# Altium PCB UCC28180-V02-XFMRS.PcbDoc
Units mil, origin at the board's own origin, x right, y up, seen from the top; angles counter-clockwise.
Board outline 6141.73 x 4803.15 mil, 2 copper layers (Top Layer, Bottom Layer), stack 12.8 mil thick; 76 components, 36 nets, 163 pads, 23 vias.
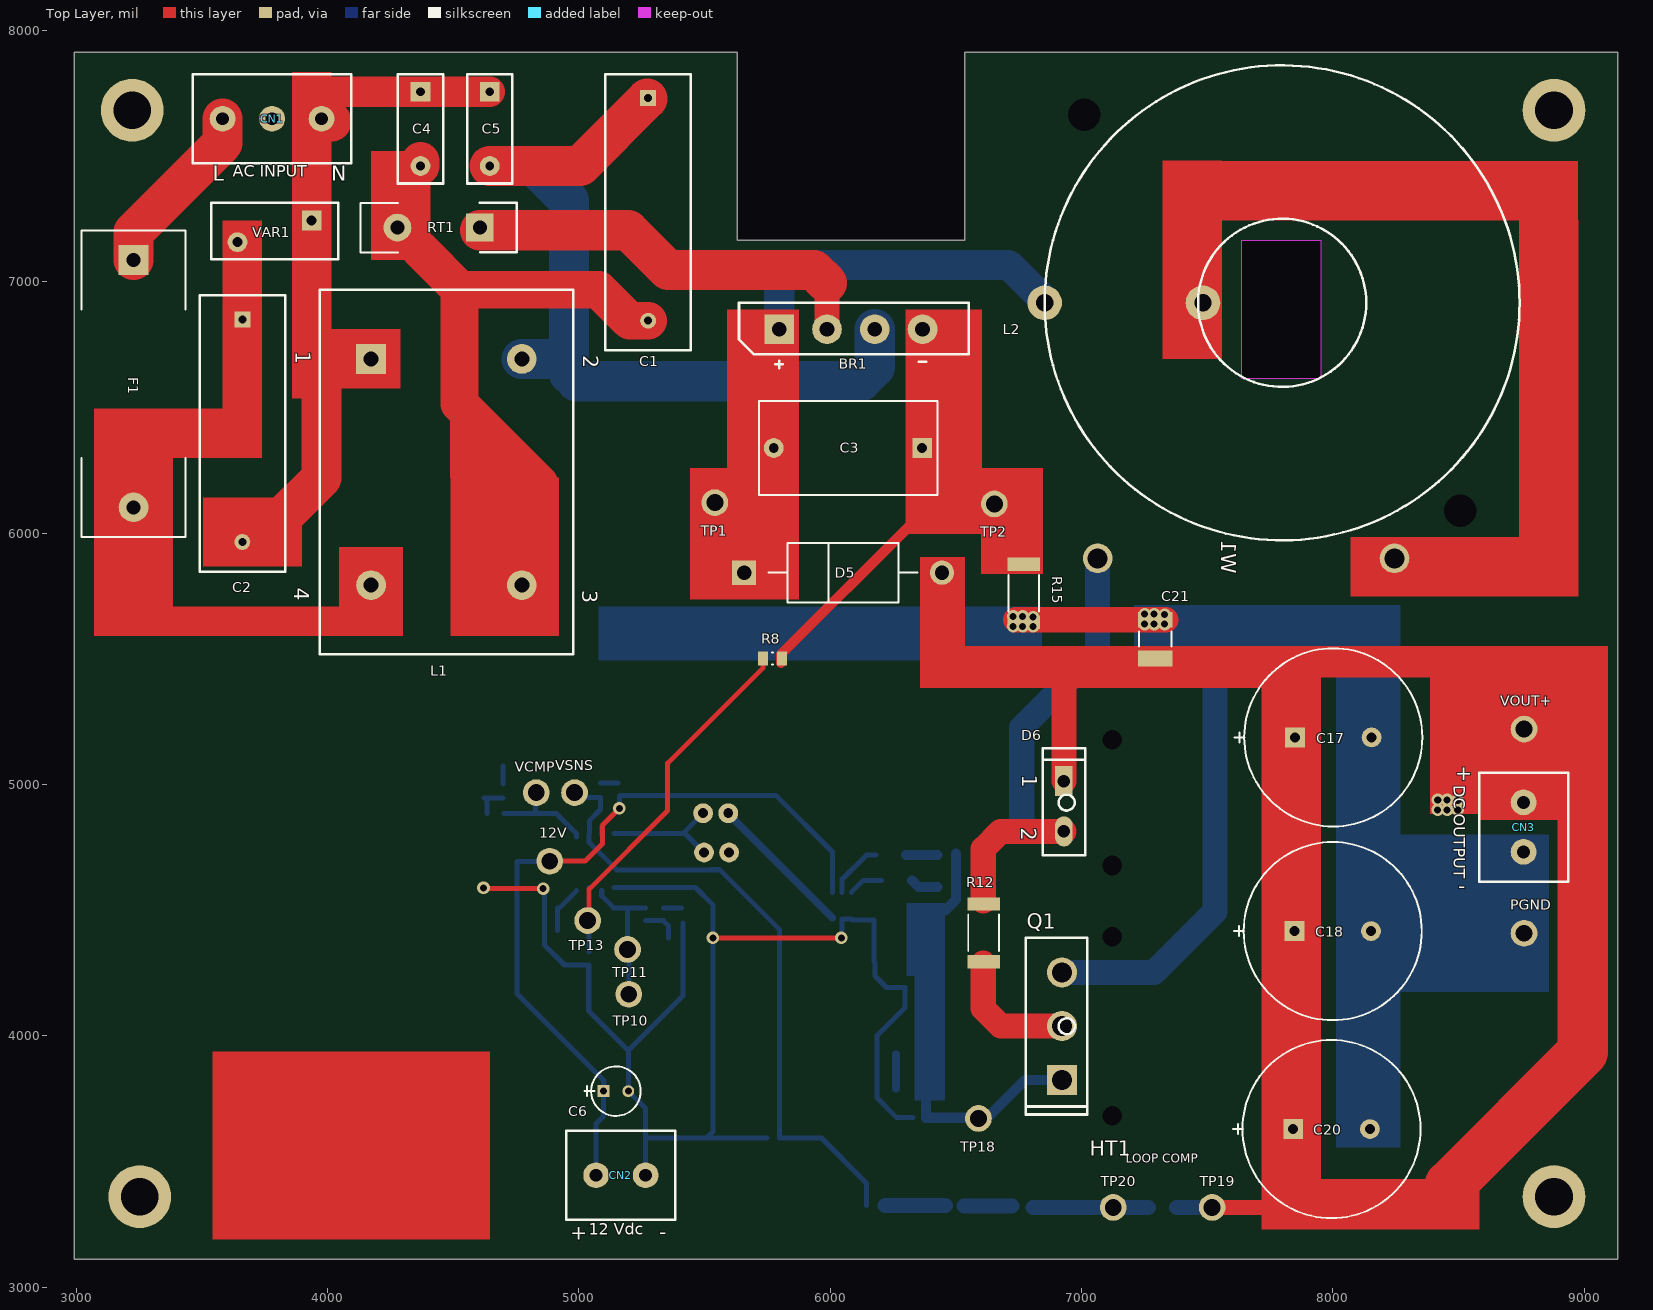
[diagram p0: Top Layer view]
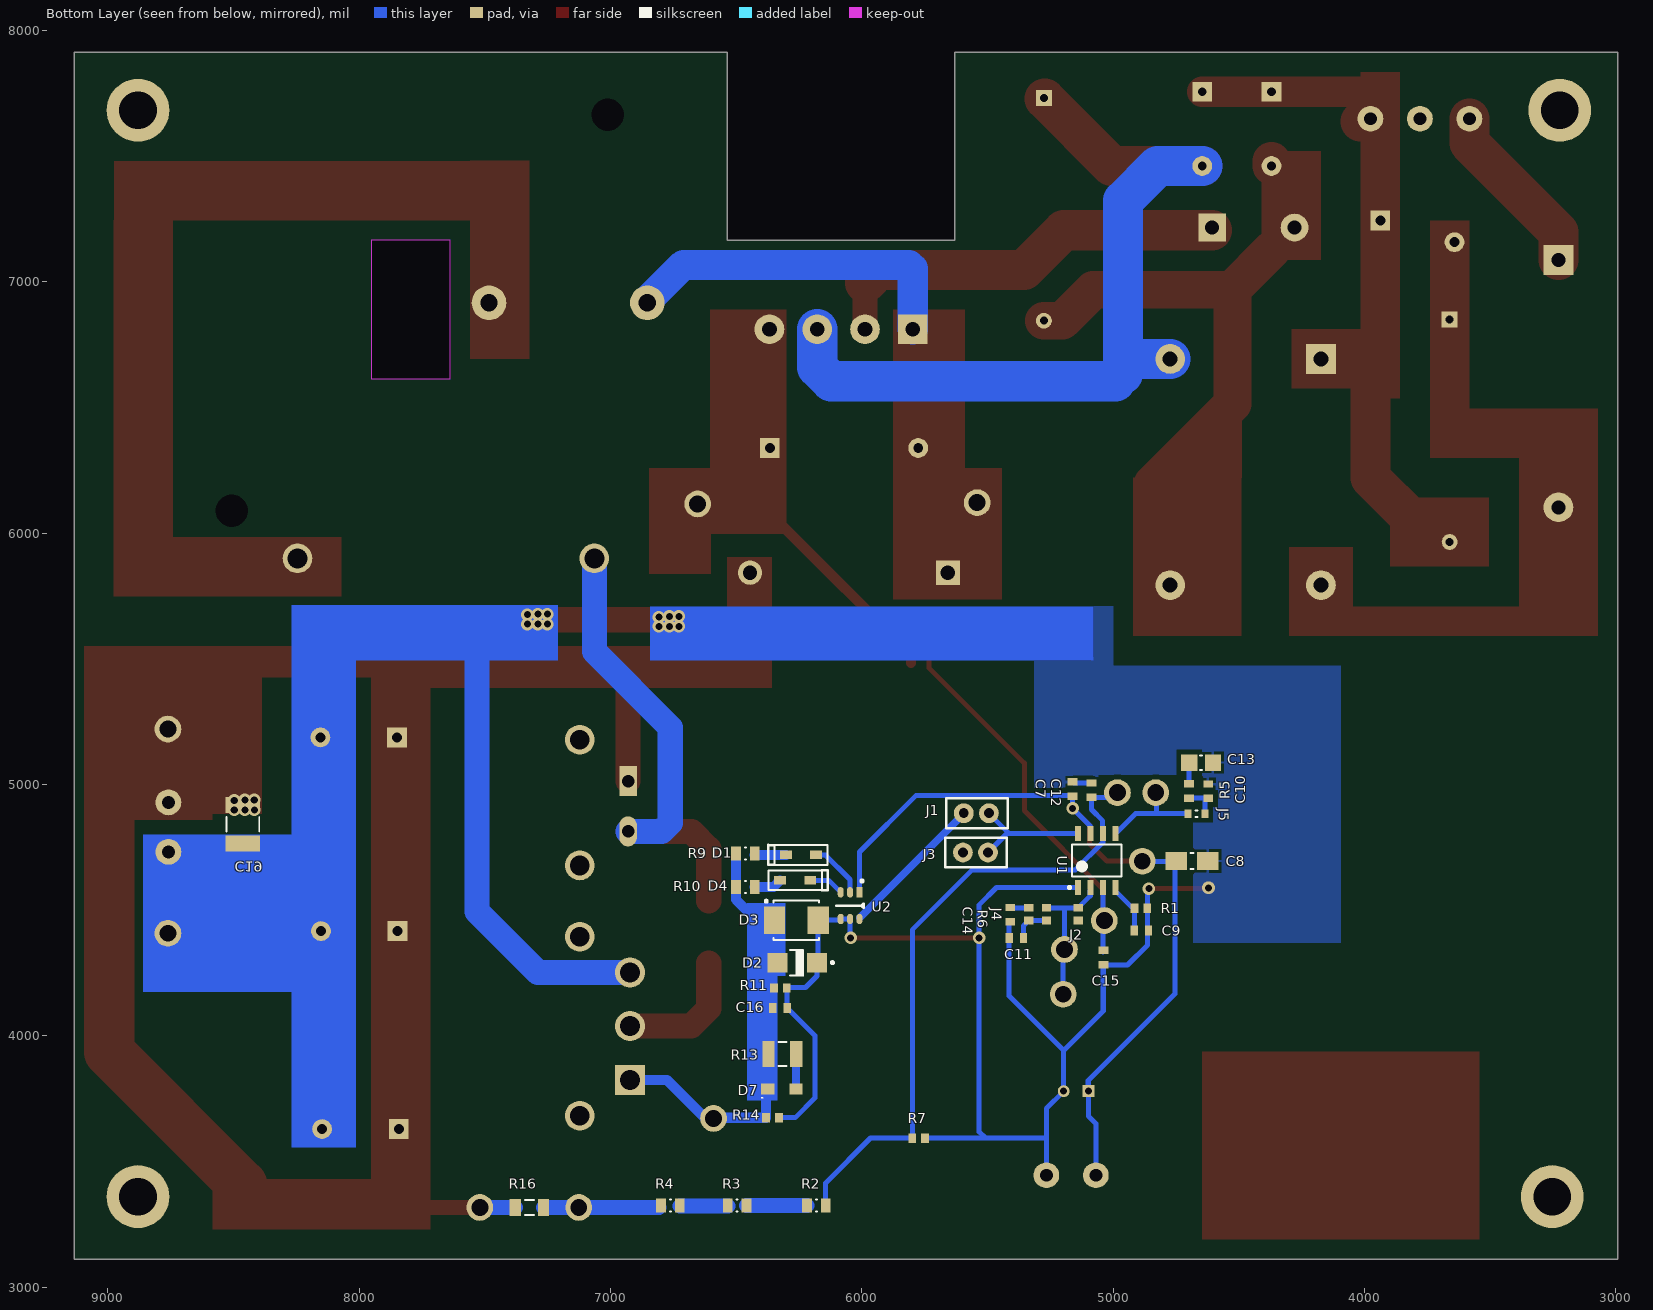
[diagram p1: Bottom Layer view, seen from below]

## Layer stack, top to bottom
Top Solder: solder mask 0.4, Solder Resist, Dk 3.5
Top Layer: signal copper 1.4
Dielectric 1: core 10, FR-4, Dk 4.2
Bottom Layer: signal copper 1.4
Bottom Solder: solder mask 0.4, Solder Resist, Dk 3.5

## Board outline
2992.13,7913.39 5629.92,7913.39 5629.92,7716.54 5629.92,7519.69 5629.92,7322.83 5629.92,7165.35 6535.43,7165.35 6535.43,7519.69 6535.43,7913.39 9133.86,7913.39 9133.86,3110.24 2992.13,3110.24
cut-out: 7637.8,7165.35 7952.76,7165.35 7952.76,6889.76 7952.76,6614.17 7637.8,6614.17

## Design rules (kind name [scope] priority, off if disabled: settings)
Clearance Clearance_2 [InNamedPolygon('Bottom Layer-No Net')] p1: gap=10 except(20: Poly-Poly Poly-Region Poly-Text)
Clearance [All] p2: gap=20 except(10: Arc-Track Arc-SMDPad Track-Track Track-SMDPad SMDPad-SMDPad)
ComponentClearance [All] p1: gap=10 collisioncheckmode=3 verticalgap=5 showdistances=FALSE
OvershootFalling [IsDesignator] p1: maximum=1.000
PolygonConnect PolygonConnect_1 [All vs IsNamedPolygon('GND_L03_P014')] p1: connectstyle=Relief reliefconductorwidth=10 reliefentries=4 polygonreliefangle="90 Angle" airgapwidth=10
PolygonConnect [All] p2: connectstyle=Relief reliefconductorwidth=10 reliefentries=4 polygonreliefangle="90 Angle" airgapwidth=10
RoutingVias [All] p1: holewidth=28 width=50 viastyle="Through Hole" minholewidth=28 minwidth=50 maxholewidth=28 maxwidth=50
SolderMaskExpansion [All] p1: expansion=4
Width [All] p1: maxlimit=300 minlimit=10 preferedwidth=40
29 further rules are at their usual default settings.

## Classes and differential pairs
component class UCC28180-2-V02: 12V C6 C7 C8 C9 C10 C11 C12 C13 C14 C15 CN2 J1 J2 J3 J4 J5 PGND R1 R2 R3 R4 R5 R6 R7 R8 TP10 TP11 TP13 U1 VCMP VSNS
component class "UCC 28180-1-V02": BR1 C1 C2 C3 C4 C5 CN1 F1 L1 RT1 TP1 TP2 VAR1
component class UCC28180-3-V02: C16 C17 C18 C19 C20 C21 CN3 D1 D2 D3 D4 D5 D6 D7 HT1 L2 Q1 R9 R10 R11 R12 R13 R14 R15 R16 TP18 TP19 TP20 U2 VOUT+ W1

## Components (designator, comment, footprint, x,y, rotation, side; value= is the part's Value field where it differs from the comment)
12V "5006" "Test Point" 4884,4694.64 r90 top (schematic designator TP9)
BR1 "GBU8J-BP" GBU8J 5797.24,6811.02 r0 top
C1 "ECQ-U2A474ML" ECQ-U2A474ML 5275.59,7730.91 r270 top
C2 "ECQ-U2A474ML" ECQ-U2A474ML 3661.42,6850.39 r270 top
C3 "ECQ-U2A334ML" CAPFILM0.33U 6366.14,6338.58 r180 top
C4 "CS11-E2GA222MYNS" CS11-E2GA222MYNS 4370.08,7755.91 r270 top
C5 "CS11-E2GA222MYNS" CS11-E2GA222MYNS 4645.67,7755.91 r270 top
C6 "ECA-1VM470" CAPALUM47U 5098.43,3779.53 r0 top
C7 "06035C104KAT2A" CAP0603 5161.26,4981.95 r90 bottom
C8 "GRM32RR71H105KA01K" CAP1206 4686.14,4695.06 r0 bottom
C9 "" CAP0603 4887.97,4418.73 r0 bottom
C10 "C0603C474K4RACTU" CAP0603 4621.88,4973.13 r270 bottom
C11 "GRM188R71H272KA01D" CAP0603 5385.4,4389.18 r180 bottom
C12 "C0603C821K5RACTU" CAP0603 5086.42,4977.13 r270 bottom
C13 "GRM21BR71A475KA73L" CAP0805 4650.17,5086.7 r0 bottom
C14 "C0603--" CAP0603 5409.33,4481.64 r90 bottom
C15 "06031C102KAT2A" CAP0603 5039.09,4311.16 r90 bottom
C16 "C0603C22NF" CAP0603 6326.04,4111.05 r0 bottom
C17 "450QXW120MEFC18X31.5" 450QXW120MEFC18X31.5 7849.25,5187.25 r0 top
C18 "450QXW120MEFC18X31.5" 450QXW120MEFC18X31.5 7846.89,4416.23 r0 top
C19 "GRM43DR72J104KW01L" CAP1812 8462.44,4841.34 r90 bottom
C20 "450QXW120MEFC18X31.5" 450QXW120MEFC18X31.5 7842.17,3628.71 r0 top
C21 "GRM43DR72J104KW01L" CAP1812 7293.04,5578.38 r270 top
CN1 "1935789" CONN_1935789 3976.38,7648.74 r180 top
CN2 "1935776" CONN_1935776 5265.75,3444.88 r180 top
CN3 "1935776" CONN_1935776 8758.94,4928.49 r270 top
D1 "DB2W40300L" Mini2-F3-B 6242.06,4719.47 r0 bottom
D2 "1SMA12CAT3G" ONSC-SMA-2-403D-02_F_V 6256.83,4290.83 r0 bottom
D3 "1SMB5927BT3G" ONSC-SMB-2-403A-03_H_V 6260.73,4459.7 r180 bottom
D4 "DB2W40300L" Mini2-F3-B 6265.19,4618.41 r180 bottom
D5 "1N5406" 1N5406 6444.88,5842.52 r180 top
D6 "C3D04060A" C3D04060A 6930,5012.98 r270 top
D7 "MBR140SFT1G" SODFL360X95-2N 6318.02,3788.4 r0 bottom
F1 "FUSE" 0031.8211 3228.35,7086.61 r270 top
HT1 "WA-DT2-101E-ND" WA-DT2-101E-ND 7122.14,5177.71 r270 top
J1 "M20-9990246" JUMPER 5494.45,4885.55 r0 bottom
J2 "M20-9990246" RES0603 5138.97,4483.61 r90 bottom
J3 "M20-9990246" JUMPER 5498.04,4729.29 r0 bottom
J4 "M20-9990246" RES0603 5265.16,4483.61 r90 bottom
J5 "M20-9990246" 0603R 4668.75,4883.53 r180 bottom
L1 "8113-RC" "EMI Choke" 4173.23,6692.91 r270 top
L2 "XFUSMI4846-HO" XFUSMI4846-HO 6065.93,6916.16 r0 top
PGND "5006" "Test Point" 8760.91,4407.51 r0 top (schematic designator TP3)
Q1 "C3M0065090D" TO-247-3 6922.31,3824.51 r90 top
R1 "CRCW060317K8FKEA" RES0603 4889.93,4507.7 r180 bottom
R2 "CRCW0805340KFKEA" RES0805 6181.1,3324.8 r180 bottom
R3 "CRCW0805332KFKEA" RES0805 6496.06,3324.8 r180 bottom
R4 "CRCW0805332KFKEA" RES0805 6761.81,3324.8 r180 bottom
R5 "CRCW060322K6FKEA" CAP0603 4697.58,4973.6 r90 bottom
R6 "CRCW0603--" RES0603 5336.3,4483.61 r90 bottom
R7 "CRCW060313K3FKEA" RES0603 5773.72,3592.93 r180 bottom
R8 "CRCW0603221RFKEA" RES0805 5770.63,5501.12 r180 top
R9 "CRCW0805R10" RES0805 6463.42,4724.97 r180 bottom
R10 "CRCW0805R4.99" RES0805 6463.42,4592.03 r180 bottom
R11 "CRCW0603RES10K" RES0603 6324.19,4190.07 r180 bottom
R12 "CRCWRSHUNT" RES2512 6610.39,4409.1 r270 top
R13 "ERJ-P14J3R3U" RES1210 6316.06,3927.56 r180 bottom
R14 "CRCW060310K0FKEA" RES0603 6355.43,3673.85 r180 bottom
R15 "CRCW2512R0.027" RES2512 6769.97,5760.92 r90 top
R16 "CRCW120649R9FKEA" RES1206 7322.83,3316.93 r180 bottom
RT1 "CL-40" CL-40 4606.3,7215.67 r180 top
TP1 "5006" "Test Point" 5541.18,6121.1 r0 top
TP2 "5006" "Test Point" 6653.39,6116.1 r0 top
TP10 "5006" "Test Point" 5198.81,4165.23 r90 top
TP11 "5006" "Test Point" 5193.66,4343.21 r270 top
TP13 "5006" "Test Point" 5035.1,4458.19 r90 top
TP18 "5006" "Test Point" 6590.12,3670.93 r90 top
TP19 "5006" "Test Point" 7519.69,3316.93 r90 top
TP20 "5006" "Test Point" 7125.98,3316.93 r90 top
U1 "UCC28180DR" SOP127P600X175-8N 5065.24,4697.3 r90 bottom
U2 "UCC27511DBV" SOP6 6009.49,4570.66 r270 bottom
VAR1 "S10K275E2" S10K275E2 3937.01,7244.09 r180 top
VCMP "5006" "Test Point" 4830.79,4967.39 r90 top (schematic designator TP14)
VOUT+ "5006" "Test Point" 8760.91,5220.37 r0 top (schematic designator TP17)
VSNS "5006" "Test Point" 4983.13,4967.39 r90 top (schematic designator TP12)
W1 "Wire" "Current Sense Wire" 8245.3,5899.27 r180 top

## Footprints (in the part's own frame and the unit in brackets; to place one, negate y for a bottom-side part, rotate by r counter-clockwise, add the part's x,y. Pads: shape width x height; smd on the part's side, far side on the other; paste and mask are expansions set on the pad)
1N5406 [mm] "Diode"
  rect 2.45x2.45 hole 1.45: 1(20,0)
  round 2.45 hole 1.45: 2(0,0)
  silkscreen extent 2.45,-3 17.55,3
0031.8211 [mm] "Fuse Holder"
  rect 3x3 hole 1.4: 1(0,0)
  round 3 hole 1.4: 2(25,0)
  silkscreen extent -3,-5.25 28,5.25, body extent 0.8,-4.62 24.9,4.98, height 11.51
450QXW120MEFC18X31.5 [mm] "Radial Electrolytic Capacitor"
  rect 2x2 hole 1: 1(0,0)
  round 2 hole 1: 2(7.75,0)
  silkscreen extent -6.1,-9 12.87,9, body extent -5.24,-9.25 12.96,8.94, height 39.75
0603R [mm]
  rect 0.7x0.85 smd: 1(-0.85,0) 2(0.85,0)
  silkscreen extent -0.1,-0.33 0.1,0.33, body extent -0.8,-0.4 0.8,0.4, height 0.6
C3D04060A [mil] "Schotky diode"
  rect 120x69.69 hole 50: 1(0,0)
  oval 120x69.69 hole 50: 2(200,0)
  silkscreen extent -130,-85 295,85
CAP0603 [mm]
  rect 0.75x1 smd: 1(-0.725,0) 2(0.725,0)
  body extent -0.87,-0.48 0.87,0.47, height 0.5
CAP0805 [mm] "Ceramic Capacitor"
  rect 1.65x1.65 smd: 1(-1.2,0) 2(1.2,0)
  silkscreen extent -0.1,-0.72 0.1,0.72, body extent -1.6,-0.76 1.6,0.76, height 2
CAP1206 [mm] "Ceramic Capacitor"
  rect 2.15x1.85 smd: 1(-1.6,0) 2(1.6,0)
  silkscreen extent -0.15,-0.82 0.15,0.82, body extent -2.25,-0.86 2.25,0.86, height 2
CAP1812 [mm] "Capacitor"
  rect 1.6x3.5 smd: 1(-1.95,0) 2(1.95,0)
  silkscreen extent -0.75,-1.65 0.75,1.65, body extent -2.4,-1.75 2.4,1.75, height 0.7
CAPALUM47U [mm] "Aluminum Capacitor"
  rect 1.2x1.2 hole 0.7: 1(0,0)
  round 1.2 hole 0.7: 2(2.5,0)
  silkscreen extent -1.93,-2.5 3.75,2.5, body extent -1.38,-2.54 3.82,2.66, height 11.5
CAPFILM0.33U [mm] "Film Capacitor"
  rect 2x2 hole 1: 1(0,0)
  round 2 hole 1: 2(15,0)
  silkscreen extent -1.52,-4.75 16.51,4.75
CL-40 [mm] "NTC Thermistor"
  rect 2.8x2.8 hole 1.4: 1(0,0)
  round 2.8 hole 1.4: 2(8.33,0)
  silkscreen extent -3.75,-2.5 12.08,2.5
CONN_1935776 [mm] "2 Pin Connector"
  round 2.6 hole 1.3: 1(0,0) 2(5,0)
  silkscreen extent -3,-4.5 8,4.5, body extent -3.2,-5.2 7.4,4.6, height 13.81
CONN_1935789 [mm] "3 Pin Connector"
  round 2.6 hole 1.3: 1(0,0) 2(5,0) 3(10,0)
  silkscreen extent -3,-4.5 13,4.5
CS11-E2GA222MYNS [mm] "Disc Cap"
  rect 2x2 hole 0.9: 1(0,0)
  round 2 hole 0.9: 2(7.5,0)
  silkscreen extent -1.78,-2.29 9.27,2.29
"Current Sense Wire" [mm]
  round 3 hole 2: 1(0,0) 2(30,0)
ECQ-U2A474ML [mm] "Film Capacitor"
  rect 1.6x1.6 hole 0.8: 1(0,0)
  round 1.6 hole 0.8: 2(22.5,0)
  silkscreen extent -2.41,-4.32 25.49,4.32
"EMI Choke" [mm]
  rect 3x3 hole 1.5: 1(0,0)
  round 3 hole 1.5: 2(0,15.24) 3(22.86,15.24) 4(22.86,0)
  silkscreen extent -6.99,-5.21 29.84,20.45
GBU8J [mm] "Bridge rectifier"
  rect 3x3 hole 1.5: 1(0,0)
  round 3 hole 1.5: 2(4.83,0) 3(9.66,0) 4(14.49,0)
  silkscreen extent -4.06,-3.94 19.18,2.67
JUMPER [mm] "JUMPER"
  round 2 hole 1: 1(0,0) 2(2.54,0)
  silkscreen extent -1.91,-1.5 4.32,1.5, body extent -1.15,-1.17 3.85,1.17, height 3
Mini2-F3-B [mm] "Schottky Diode"
  rect 1.2x0.85 smd: 1(1.525,0) 3(-1.525,0)
  silkscreen extent -2.7,-1.02 3.3,1
ONSC-SMA-2-403D-02_F_V [mm] "Molded, 2-Leads, Body 4.32x2.6mm"
  rect 2x2 smd: 1(-2,0) 2(2,0)
  silkscreen extent -3.67,-1.3 0.74,1.3, body extent -2.16,-1.3 2.16,1.3, height 2.2
ONSC-SMB-2-403A-03_H_V [mil] "Molded, 2-Leads, Body 4.6x3.95mm"
  rect 85x107.99 smd: 1(-87.01,0) 2(87.01,0)
  silkscreen extent -125,-79 91,81, body extent -91,-78 91,78, height 95
RES0603 [mm]
  rect 0.8x0.95 smd: 1(-0.65,0) 2(0.65,0)
  body extent -0.83,-0.48 0.82,0.48, height 0.5
RES0805 [mm]
  rect 1x1.4 smd: 1(-0.95,0) 2(0.95,0)
  silkscreen extent -0.05,-0.6 0.05,0.6, body extent -1.1,-0.7 1.1,0.7, height 0.5
RES1206 [mm]
  rect 1.15x1.75 smd: 1(-1.425,0) 2(1.425,0)
  silkscreen extent -0.45,-0.77 0.45,0.77, body extent -1.65,-0.87 1.65,0.87, height 0.5
RES1210 [mm] "Chip Resistor"
  rect 1.25x2.65 smd: 1(-1.4,0) 2(1.4,0)
  silkscreen extent -0.4,-1.22 0.4,1.23, body extent -1.68,-1.32 1.68,1.32, height 2
RES2512 [mm]
  rect 1.35x3.3 smd: 1(-2.925,0) 2(2.925,0)
  silkscreen extent -1.85,-1.55 1.85,1.55, body extent -3.25,-1.65 3.25,1.65, height 0.7
S10K275E2 [mm] "Varistor"
  rect 2x2 hole 1: 1(0,0)
  round 2 hole 1: 2(7.5,2.2)
  silkscreen extent -2.67,-1.78 10.16,3.94
SODFL360X95-2N [mm] "SODFL, 2-Leads, Body 1.65x3.60mm, IPC Medium Density"
  rect 1.35x1.1 smd: 1(-1.425,0) 2(1.425,0)
  silkscreen extent 1.96,0.86 2.06,0.96, body extent -1.45,-0.9 1.45,0.9, height 0.95
SOP6 [mm]
  rect 1.05x0.6 smd: 1(0,0)
  oval 1.05x0.6 smd: 2(0,-0.95) 3(0,-1.9) 4(2.7,-1.9) 5(2.7,-0.95) 6(2.7,0)
  silkscreen extent -1.27,-2.38 1.59,0.48, body extent 0.67,-2.34 2.02,0.46, height 2
SOP127P600X175-8N [mm] "SOP, 8-Leads, Body 4.90x3.90mm, Pitch 1.27mm, IPC Medium Density"
  rect 1.55x0.6 smd: 1(-2.725,1.905) 2(-2.725,0.635) 3(-2.725,-0.635) 4(-2.725,-1.905) 5(2.725,-1.905) 6(2.725,-0.635) 7(2.725,0.635) 8(2.725,1.905)
  silkscreen extent -2.85,-2.5 1.6,2.88, body extent -2,-2.5 2,2.5, height 1.75
"Test Point" [mm] "Test Point"
  round 2.7 hole 1.7: 1(0,0)
  body extent -1.63,-1.5 1.55,1.68, height 5.49
TO-247-3 [mm] "Transistor"
  rect 3.04x3.04 hole 2.03: 1(0,0)
  round 3.04 hole 2.03: 2(5.43,0) 3(10.86,0)
  silkscreen extent -3.5,-2.54 14.36,3.68
WA-DT2-101E-ND [mm] "Heatsunk"
  round 0 / inner round 0 / far side round 3 hole 2: 1(0,0) 2(12.7,0) 3(19.9,0) 4(38,0)
  silkscreen extent 5.54,-5.4 29.76,-3.79, body extent -5,-9 43,7, height 7.25
XFUSMI4846-HO [mm] "Boost Inductor"
  round 3.5 hole 1.75: 1(20,0) 2(36,0)
  silkscreen extent 20,-24 68,24, body extent 19.94,-23.06 67.44,24.43, height 22.87

## Part data
12V PGND TP1 TP2 TP10 TP11 TP13 TP18 TP19 TP20 VCMP VOUT+ VSNS: "TEST POINT PC COMPACT .063\"D BLK"
BR1: "RECT BRIDGE GPP 8A 600V GBU"
C1 C2: "CAP FILM 0.47UF 20% 275VAC RAD"
C3: "CAP FILM 0.33UF 20% 275VAC RAD"
C4 C5: "CAP CER 2200PF 250VAC RADIAL"
C6: "CAP ALUM 47UF 20% 35V RADIAL"
C7: "CAP CER 0.1UF 50V X7R 0603"
C8: "CAP CER 1UF 50V X7R 1210"
C9: library part Cap, "Capacitor"
C10: "CAP CER 0.47UF 16V X7R 0603"
C11: "CAP CER 2700PF 50V X7R 0603"
C12: "CAP CER 820PF 50V X7R 0603"
C13: "CAP CER 4.7UF 10V X7R 0805"
C15: "CAP CER 1000PF 100V X7R 0603"
C19 C21: "CAP CER 0.1UF 630V X7R 1812"
CN1: "CONN TERM BLOCK 3POS 5.0MM"
CN2 CN3: "CONN TERM BLOCK 2POS 5.0MM"
D2: "400 W Peak Power Zener Transient Voltage Suppressor, 2-Pin SMA, Pb-Free, Tape and Reel"
D3: "3 W Zener Voltage Regulator, 2-Pin SMB, Pb-Free, Tape and Reel"
D5: library part 1N5406RLG, "DIODE GEN PURP 600V 3A DO201AD"
D6: "DIODE SCHOTTKY 600V 4A TO220-2"
D7: "DIODE SCHOTTKY 40V 1A SOD123L"
J1 J2 J3 J4 J5: "SIL VERTICAL PC TAIL PIN HEADER"
L1: "CMC 5MH 8.9A 2LN TH"
Q1: "MOSFET N-CH 900V 36A TO247-3"
R1: "RES SMD 17.8K OHM 1% 1/10W 0603"
R2: "RES SMD 340K OHM 1% 1/8W 0805"
R3 R4: "RES SMD 332K OHM 1% 1/8W 0805"
R5: "RES SMD 22.6K OHM 1% 1/10W 0603"
R7: "RES SMD 13.3K OHM 1% 1/10W 0603"
R8: "RES SMD 221 OHM 1% 1/10W 0603"
R13: "RES SMD 3.3 OHM 5% 1/2W 1210"
R14: "RES SMD 10K OHM 1% 1/10W 0603"
R16: "RES SMD 49.9 OHM 1% 1/4W 1206"
RT1: "ICL 5 OHM 25% 6A 19.56MM"
U1: "IC PFC CTRLR AVERAGE CURR 8SOIC"
VAR1: "VARISTOR 430V 3.5KA DISC 10MM"

## Free pads (board coordinates)
  round 250 hole 150: 1(3223.21,7682.2) 2(8880,7682.2) 3(8880,3360) 4(3253.07,3360)
  round 0 hole 130: 5(7010.81,7664.19) 6(8506.87,6089.39)

## Via types
v1: diameter 50, hole 28, Top Layer to Bottom Layer, 13 vias
v2: diameter 50, hole 28, Top Layer to Bottom Layer, tented top, 6 vias
v3: diameter 50, hole 28, Top Layer to Bottom Layer, tented both sides, 4 vias

## Nets (pads, with @x,y where several pads share a name; then routed paths per layer and width w, separated by ;. In a path a pad name is that pad's centre, name@x,y a point inside that pad or via, vN(x,y) a via of type N, cw(c..) or ccw(c..) an arc to the next point about the centre after c; other vN are vias at no path point)
12V: 12V.1 C6.1 C7.1 C8.2 CN2.2 U1.7 U2.1 | length 3225.2
  Top Layer w20: 12V.1 5024.66,4694.64 5056.07,4726.04 5056.16,4726.04 5093.47,4763.34 5093.47,4836.63 v3(5161.26,4904.42)
  Bottom Layer w20: 12V.1@4882.19,4692.83 4754.91,4692.83 4754.91,4165.84 5099.16,3821.59 C6.1@5099.16,3780.27 ; CN2.2 5068.9,3650.53 5098.43,3680.05 C6.1 ; U1.7 5090.24,4833.4 v3(5161.26,4904.42) C7.1 5164.66,4956.82 5783.72,4956.82 6009.49,4731.05 U2.1 ; U1.7@5090.56,4799.93 5090.64,4804.57 U1.7@5090.6,4802.25
GND: C6.2 C7.2 C8.1 C9.1 C10.1 C11.1 C12.1 C13.1 C14.1 C15.1 C16.1 C17.2 C18.2 C19.1 C20.2 C21.1 CN2.1 CN3.2 D2.1 D3.2 PGND.1 Q1.3 R1.2 R7.2 R11.2 R14.2 R15.1 U1.1 U2.4 U2.5 | length 8295.3
  Top Layer w20: v1@4620.63,4585.67 v3(4857.83,4585.67) ; v3(5533.16,4389.18) v3(6044.2,4389.18)
  Top Layer w100: R15.1@6737.95,5655.15 C21.1@7336.66,5655.15
  Bottom Layer w20: R1.2@4863.64,4509.28 4863.64,4360.68 4942.75,4281.56 5039.5,4281.56 5039.5,4098.59 5196.85,3941.23 ; R1.2 v3@4864.34,4579.16 ; C12.1 C7.2@5156.44,5005.68 ; U1.1 5464.14,4590.01 5533.16,4520.99 v3(5533.16,4389.18) 5533.16,3617.92 5508.17,3592.93 ; CN2.1 5265.75,3710.63 C6.2 5196.85,3941.23 ; 5268.21,3592.93 5508.17,3592.93 ; C14.1@5413.95,4448.48 C11.1 5413.95,4158.33 5196.85,3941.23 ; R7.2 5508.17,3592.93 ; v3@6046.89,4391.87 U2.5 U2.4 6088.95,4459.7 D3.2 D2.1@6173.72,4295.19 ; D2.1 6178.09,4237.76 6224.1,4191.75 R11.2@6296.92,4191.75 ; C16.1 6187.24,4000.8 6187.24,3752.04 6265.42,3673.85 R14.2 ; C16.1@6298.6,4112.15 R11.2
  Bottom Layer w100: Q1.3 7288.74,4252.07 7531.33,4494.66 7531.33,5653.08
  other v1: 4620.63,4588.22 6727.82,5628.53 6765.89,5628.53 6807.9,5628.53 7250.9,5637.92 7288.97,5637.92 7330.98,5637.92 6807.9,5665.96 6728.28,5668.46 6765.89,5667.99 7330.98,5675.34 7288.97,5677.38 7251.36,5677.84
NetBR1_1: BR1.1 C3.2 D5.1 L2.1 TP1.1 | length 1347.3
  Bottom Layer w120: BR1.1 5797.24,7052.24 ; 5811.93,7066.93 6710.1,7066.93 L2.1@6857.1,6919.93
NetBR1_2: BR1.2 RT1.1 | length 1651.9
  Top Layer w100: BR1.2 5987.4,6994.88
  Top Layer w160: RT1.1@4606.3,7204.72 5196.85,7204.72 5354.33,7047.24 5935.04,7047.24 5987.4,6994.88
NetBR1_3: BR1.3 C1.1 C5.2 L1.2 | length 3288.3
  Top Layer w160: C5.2 5005.31,7460.63 C1.1@5272.42,7727.74
  Bottom Layer w160: C5.2 4822.83,7460.63 4960.63,7322.83 4960.63,6633.86 ; L1.2 4901.57,6692.91 ; 4990.16,6604.33 6122.05,6604.33 6177.56,6659.84 BR1.3
NetBR1_4: BR1.4 C3.1 R8.1 R15.2 TP2.1 | length 814.3
  Top Layer w40: R8.1@5804.62,5484.07 5804.62,5517.72 6322.12,6035.22 6322.12,6084.03
NetC1_2: C1.2 C4.2 L1.3 RT1.2 | length 1962.3
  Top Layer w150: 4370.08,7125.98 4527.56,6968.5 5078.74,6968.5 5202.17,6845.08 C1.2 ; C4.2 C4.2@4370.08,7480.31 ; 4525.51,6970.55 4525.51,6514.49 4842.52,6197.48 4842.52,6181.1
NetC2_1: C2.1 F1.2 L1.4 VAR1.2
NetC2_2: C2.2 C4.1 C5.1 CN1.1 L1.1 VAR1.1 | length 1362.5
  Top Layer w120: 4010.67,7755.91 C4.1 C5.1
  Top Layer w160: 3799.21,5964.57 3799.21,6043.31 3976.38,6220.47 3976.38,6574.8 ; CN1.1 4004.8,7648.74 CN1.1@4015.75,7637.8
NetC9_2: C9.2 R1.1 U1.4 | length 193.3
  Bottom Layer w20: R1.1 R1.1@4915.96,4507.7 ; C9.2@4915.96,4418.73 R1.1@4915.96,4507.7 ; U1.4@4991.21,4576.93 4921.98,4507.7 R1.1@4915.96,4507.7
NetC10_2: C10.2 J5.2 R5.1 | length 122.9
  Bottom Layer w20: C10.2@4622.35,4945.06 R5.1 ; J5.2 C10.2@4635.29,4931.18
NetC11_2: C11.2 J4.1 R6.1 | length 148.5
  Bottom Layer w20: J4.1 R6.1 5356.86,4437.46 C11.2
NetC12_2: C12.2 R2.2 R7.1 U1.6 VSNS.1 | length 2515.8
  Bottom Layer w20: VSNS.1@5001.93,4948.59 C12.2 5086.42,4900.09 5041.67,4855.34 U1.6@5041.67,4806.01 ; U1.6@5040.71,4800.23 5040.71,4769.84 5150.64,4659.92 5526.77,4659.92 5527.35,4660.49 5560.13,4660.49 5799.31,4421.3 R7.1 5965.25,3592.93 6143.7,3414.48 R2.2
NetC13_2: C13.2 R5.2 | length 70.5
  Bottom Layer w20: R5.2 C13.2@4697.58,5072.64
NetC14_2: C14.2 R6.2 | length 72
  Bottom Layer w20: R6.2 C14.2@5408.34,4509.2
NetC15_2: C15.2 R8.2 TP13.1 U1.3 | length 1592.3
  Top Layer w20: TP13.1@5026.1,4458.92 5040.89,4473.71 5040.89,4583.15 5353.61,4895.87 5353.61,5084.49 5733.23,5464.12 R8.2
  Bottom Layer w20: C15.2@5040.24,4332.85 U1.3
NetC16_2: C16.2 D2.2 D3.1 D7.2 Q1.1 R9.1 R10.1 R11.1 R13.1 R14.1 TP18.1 | length 1118.3
  Bottom Layer w40: R13.1@6364.61,3934.12 R13.1 6371.17,3791.35 D7.2 ; D7.2@6381.02,3781.51 R14.1 6625.22,3673.85 6775.88,3824.51 Q1.1 ; 6444.71,4498.69 6458.02,4498.69 6500.82,4541.49 R10.1 R9.1
NetC17_1: C17.1 C18.1 C19.2 C20.1 C21.2 CN3.1 D5.2 D6.1 R16.1 TP19.1 VOUT+.1 | length 2558.8
  Top Layer w60: TP19.1 7744.75,3316.93
  Top Layer w100: D6.1 6930,5438.54
  Top Layer w200: 8464.57,3405.55 8994.31,3935.29 8994.31,4953.59
  Bottom Layer w60: R16.1 TP19.1
  other v2: 8416.97,4898.58 8455.04,4898.58 8497.05,4898.58 8497.05,4936 8455.04,4938.04 8417.43,4938.5
NetCN1_3: CN1.3 F1.1 | length 708.9
  Top Layer w160: F1.1 3228.35,7197.83 3582.68,7552.17 CN1.3
NetD1_1: D1.1 R9.2 | length 123.9
  Bottom Layer w40: D1.1 R9.2@6426.02,4719.47
NetD1_3: D1.3 U2.2 | length 226.5
  Bottom Layer w20: U2.2 6046.89,4621.37 6144.99,4719.47 D1.3
NetD4_1: D4.1 U2.3 | length 140.6
  Bottom Layer w20: U2.3 6132.04,4618.41 D4.1
NetD4_3: D4.3 R10.2 | length 111.7
  Bottom Layer w40: D4.3 6351.61,4592.03 R10.2
NetD6_2: D6.2 R12.1 W1.2 | length 1916
  Top Layer w100: R12.1@6609.13,4536.48 6609.13,4743.85 6678.27,4812.98 D6.2
  Bottom Layer w100: D6.2 6796.35,4812.98 6762.21,4847.12 6762.21,5226.78 7064.2,5528.76 W1.2
NetD7_1: D7.1 R13.2 | length 138.2
  Bottom Layer w30: D7.1 R13.2@6261.92,3926.58
NetJ1_1: J1.1 J3.1 U1.8 | length 495.1
  Bottom Layer w20: U1.8 5414.96,4804.58 5414.96,4806.07 J1.1 ; 5422.75,4804.58 J3.1
NetJ1_2: J1.2 U2.6 | length 587
  Bottom Layer w30: J1.2@5592.77,4884.42 U2.6@6007.81,4469.39
NetJ2_1: J2.1
NetJ2_2: J2.2 J4.2 TP10.1 TP11.1 U1.2 | length 552.5
  Bottom Layer w20: U1.2@5091.21,4576.93 5091.21,4556.96 J2.2 5193.66,4509.2 ; TP11.1 5193.66,4509.2 ; TP10.1 TP11.1@5198.81,4338.06 ; J4.2 5193.66,4509.2
NetJ5_1: J5.1 U1.5 VCMP.1 | length 404.2
  Bottom Layer w20: J5.1@4702.44,4883.76 4827.35,4883.76 ; VCMP.1@4827.35,4963.95 4827.35,4883.76 ; U1.5 4911.06,4883.76 4827.35,4883.76 ; U1.5@4991.21,4791.5 U1.5@4991.21,4794.92
NetJ6_2: 
NetL2_2: L2.2 W1.1
NetQ1_2: Q1.2 R12.2 | length 523.7
  Top Layer w100: R12.2@6609.13,4289.89 6609.13,4108.37 6678.68,4038.82 6921.78,4038.82 Q1.2
NetR2_1: R2.1 R3.2 | length 240.2
  Bottom Layer w60: R2.1 R3.2
NetR3_1: R3.1 R4.2 | length 190.9
  Bottom Layer w60: R3.1@6532.94,3323.24 R4.2@6723.89,3323.24
NetR4_1: R4.1 R16.2 TP20.1 | length 459.6
  Bottom Layer w60: R4.1@6807.09,3316.93 TP20.1 R16.2
pads on no net: CN1.2 HT1.1 HT1.2 HT1.3 HT1.4 J3.2

## Polygon pours and split planes (outlines as drawn)
GND on Bottom Layer "GND" (solid, pour order 4): 5118.11,4960.63 5314.96,4960.63 5314.96,5708.66 5196.85,5708.66 5078.74,5708.66 5000,5708.66 5000,5590.55 5000,5472.44 4642.93,5472.44 4645.67,5039.37 4803.15,5039.37 5000,5039.37 5039.37,5039.37 5059.06,5039.37 5059.06,5019.69 5059.06,5000 5118.11,5000
GND on Bottom Layer "GND" (solid, pour order 2): 4094.49,5472.44 4682.3,5472.44 4682.3,4370.08 4448.82,4370.08 4094.49,4370.08 4135.45,4370.08 4094.49,4370.08

## Other copper
Top Layer:
  rectangle net NetL2_2: 8069.56,5746.77 8976.46,5983.57
  rectangle net NetC17_1: 6357.15,5539.74 6536.35,5904.01
  rectangle net NetC1_2: 4670,6180 4790,6340
  rectangle net NetC1_2: 4488.19,6220 4685.04,6450
  rectangle net NetC1_2: 4173.23,7086.61 4409.45,7519.69
  rectangle net NetC2_2: 3503.94,5866.14 3897.64,6141.73
  rectangle net NetC2_1: 3070.87,6299.21 3740.16,6496.06
  rectangle net NetC2_1: 3582.68,6496.06 3740.16,7244.09
  rectangle net NetC2_1: 3385.83,5590.55 4045.28,5708.66
  rectangle net NetC2_1: 3070.87,5590.55 3385.83,6299.21
  rectangle net NetC2_1: 4045.28,5590.55 4301.18,5944.88
  rectangle net NetC1_2: 4489.48,5590.55 4921.26,6220.47
  rectangle net NetC2_2: 4015.75,6574.8 4291.34,6811.02
  rectangle net NetC2_2: 3858.27,6535.43 4015.75,7834.65
  rectangle: 3543.31,3188.98 4645.67,3937.01
  rectangle net NetL2_2: 7559.06,7243 8976.38,7481.36
  rectangle net NetL2_2: 8740.38,5749.48 8976.86,7245.82
  rectangle net NetBR1_1: 5589.56,6043.31 5875.98,6889.76
  rectangle net NetBR1_4: 6299.21,5996.42 6603.48,6889.76
  rectangle net NetBR1_1: 5442.91,5736.18 5875.89,6259.84
  rectangle net NetBR1_4: 6599.53,5837.29 6847.39,6259.84
  rectangle net NetC17_1: 7716.54,3228.35 7952.76,5431.78
  rectangle net NetC17_1: 7913.39,3228.35 8582.68,3430.09
  rectangle net NetC17_1: 8583.22,4859.25 9094.77,5551.18
  rectangle net NetC17_1: 8385.83,4881.89 8622.05,5433.07
  rectangle net NetL2_2: 7322.83,6692.91 7559.06,7481.92
  rectangle net NetC17_1: 7716.44,5425.17 8584.39,5551.04
  rectangle net NetC17_1: 6357.26,5384.54 7717.57,5550.28
Bottom Layer:
  rectangle net NetC16_2: 6303.43,4237.61 6456.48,4528.47
  rectangle net NetC16_2: 6334.59,3742.2 6456.48,4237.61
  rectangle net GND: 5078.74,5492.13 6842.28,5708.66
  rectangle net GND: 7209.35,5492.13 8266.88,5714.2
  rectangle net GND: 8011.81,3555.68 8269.34,5713.71
  rectangle net GND: 8253.13,4173.81 8860.04,4800.69

## Silkscreen, mask and mechanical layers (free items; w line width, h text height)
Top Overlay:
  text "L" at 3543.31,7401.57 h60
  text "AC INPUT" at 3622.05,7401.57 h80
  text "N" at 4015.75,7401.57 h60
  text "+" at 8487.43,5016.33 h60
  text "DC OUTPUT" at 8464.27,4997.3 h80 r270
  text "-" at 8499.41,4567.8 h60
  text "LOOP COMP" at 7175.77,3481.89 h60
  text "12 Vdc" at 5040.06,3192.32 h80
  text "-" at 5319.91,3191.28 h60
  text "+" at 4965.32,3187.96 h60
Top Solder:
  drawing of 1445 lines, arcs and shapes, not listed
  text "US Medical Innovation" at 3851.7,3584.83 h65
  text "PMLS 14-003-01-V02" at 3543.31,3188.98 h60

## Text inside footprints (layer, text, board x,y; h text height)
D6: Top Overlay "2" at 6760,4827.98 h60 r270; Top Overlay "1" at 6765,5037.98 h60 r270
L1: Top Overlay "2" at 5018.23,6707.91 h60 r270; Top Overlay "3" at 5013.23,5772.91 h60 r270; Top Overlay "4" at 3868.23,5782.91 h60 r270; Top Overlay "1" at 3873.23,6722.91 h60 r270